# Altium PCB FIT_PM_Dual_Range_AFE.PcbDoc (part 11 of 17)
Units mm, origin at the board's own origin, x right, y up, seen from the top; angles counter-clockwise.
Board outline 259 x 114 mm, 8 copper layers (Top Layer, Mid-Layer 1, Mid-Layer 2, Layer 1, Layer 2, Mid-Layer 3, Mid-Layer 4, Bottom Layer), stack 1.616 mm thick; 963 components, 806 nets, 4757 pads, 2208 vias.
Unrouted connection lines stored in the file: 682.
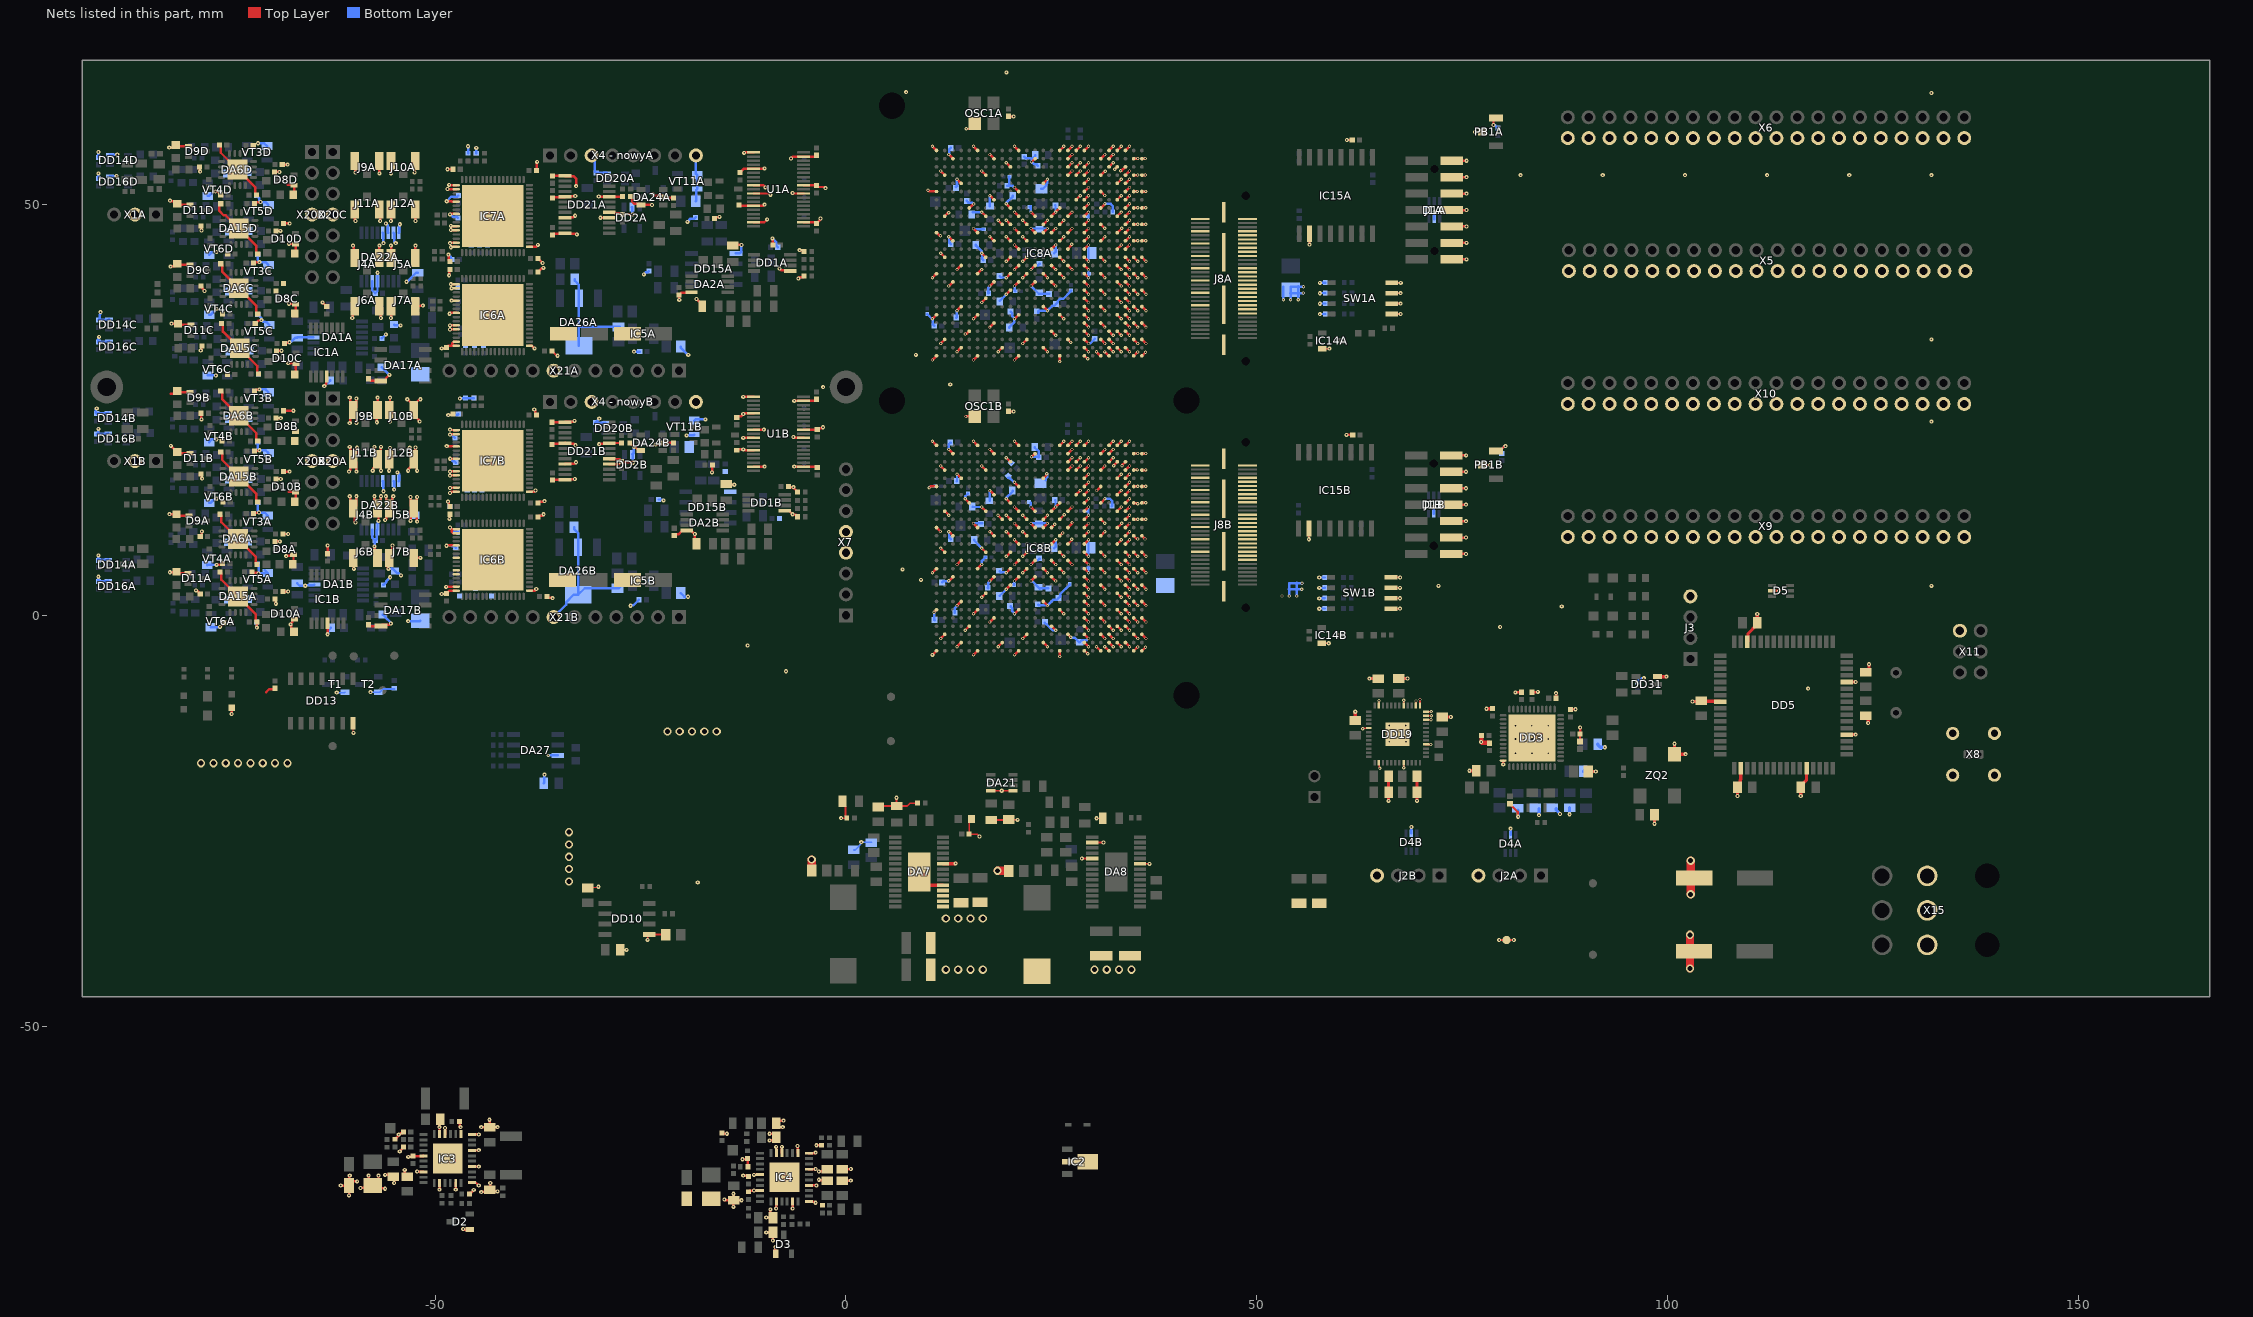
[diagram p13: the nets of this part, all layers, seen from the top]

## Via types
v1: diameter 0.5, hole 0.2, Top Layer to Bottom Layer, tented both sides, 1234 vias
v2: diameter 0.4, hole 0.2, Top Layer to Bottom Layer, tented both sides, 876 vias
v3: diameter 1, hole 0.6, Top Layer to Bottom Layer, tented both sides, 74 vias
v4: diameter 0.8, hole 0.4, Top Layer to Bottom Layer, tented both sides, 15 vias
v5: diameter 0.5, hole 0.2, Top Layer to Bottom Layer, 9 vias

## Nets (pads, with @x,y where several pads share a name; then routed paths per layer and width w, separated by ;. In a path a pad name is that pad's centre, name@x,y a point inside that pad or via, vN(x,y) a via of type N, cw(c..) or ccw(c..) an arc to the next point about the centre after c; other vN are vias at no path point) (continued)
GND: (continued)
  Top Layer w0.3: v1(-82.368,56.936) -82.361,56.943 -81.893,56.943 C154D.1@-81.568,57.268 -81.418,57.118 D9D.1@-80.168,57.118 ; v1(-82.35,12.325) -81.525,12.325 C154A.1@-81.5,12.3 -81.35,12.15 D9A.1@-80.1,12.15 ; v1(-82.3,5.25) -81.55,5.25 C156A.1@-81.5,5.3 ; v1(-82.288,50.478) -82.234,50.478 -82.181,50.425 -81.725,50.425 -81.25,49.95 D11D.1@-80,49.95 ; -82.2,26.968 -82.193,26.975 -81.725,26.975 C154B.1@-81.4,27.3 -81.25,27.15 D9B.1@-80,27.15 ; v1(-82.2,42.45) -82.175,42.475 -81.725,42.475 C154C.1@-81.4,42.8 -81.25,42.65 D9C.1@-80,42.65 ; v1(-82.168,20.633) -82.158,20.633 -81.275,19.75 D11B.1@-80,19.75 ; v1(-82.1,35.5) -81.272,35.5 -81.122,35.35 D11C.1@-79.9,35.35 ; C156A.1@-81.35,5.15 D11A.1@-80.1,5.15 ; v1(-79.124,3.04) -79.085,3.002 -78.997,3.002 -78.76,2.764 -78.76,2.76 C92A.1@-78.6,2.6 ; C89D.1@-78.668,54.568 -78.643,54.543 -78.643,54.033 v1(-78.618,54.008) ; C89A.1@-78.6,9.6 -78.44,9.76 -78.44,10.106 -78.4,10.146 v1(-78.4,10.2) ; v1(-78.537,32.24) -78.499,32.278 -78.499,32.701 C92C.1@-78.4,32.8 ; C286B.1@-78.5,17.2 -78.41,17.11 -78.41,16.678 v1(-78.371,16.64) ; C89B.1@-78.5,24.6 -78.475,24.575 -78.475,23.879 v1(-78.451,23.854) ; C288C.1@-78.5,40.1 -78.34,39.94 -78.34,39.795 -78.086,39.542 v1(-78.086,39.488) ; C286D.1@-78.5,47.4 -78.475,47.375 -78.475,46.865 v1(-78.45,46.84) ; v1(-76.77,51.582) -76.732,51.543 -76.443,51.543 C102D.1@-76.1,51.2 ; v1(-76.602,6.15) -76.589,6.163 -76.037,6.163 C102A.1@-75.9,6.3 ; C91D.1@-76.268,57.268 -76.108,57.108 -76.108,56.308 DA6D.17@-74.068,54.268 -71.928,52.128 -71.928,51.328 C291D.1@-71.768,51.168 ; v1(-76.2,-1.4) C63A.1@-75.7,-0.9 ; C93A.1@-76.2,5.3 -76.04,5.14 -76.04,4.34 DA15A.17@-74,2.3 -71.86,0.16 -71.86,-0.64 C287A.1@-71.7,-0.8 v1(-71.7,-1.5) ; C91A.1@-76.2,12.3 -76.04,12.14 -76.04,11.34 DA6A.17@-74,9.3 -71.86,7.16 -71.86,6.36 C291A.1@-71.7,6.2 ; C287B.1@-76.1,19.9 -75.94,19.74 -75.94,18.94 DA15B.17@-73.9,16.9 -71.76,14.76 -71.76,13.96 C93B.1@-71.6,13.8 ; C91B.1@-76.1,27.3 -75.94,27.14 -75.94,26.34 DA6B.17@-73.9,24.3 -71.76,22.16 -71.76,21.36 C291B.1@-71.6,21.2 ; C91C.1@-76.1,42.8 -75.94,42.64 -75.94,41.84 DA6C.17@-73.9,39.8 -71.76,37.66 -71.76,36.86 C291C.1@-71.6,36.7 ; C93D.1@-76.1,50.1 -76.26,49.94 -76.26,49.662 -76.275,49.647 -76.275,49.233 -75.733,48.692 -75.492,48.692 -71.76,44.96 -71.76,44.16 C287D.1@-71.6,44 ; C93C.1@-76,35.5 -75.84,35.34 -75.84,34.54 DA15C.17@-73.8,32.5 -71.66,30.36 -71.66,29.56 C287C.1@-71.5,29.4 ; v1(-74.781,-12.012) LD1.1@-74.781,-11.239 ; C64A.1@-72.3,5.3 -72.201,5.201 -71.655,5.201 -71.554,5.1 v1(-71.5,5.1) ; C74A.1@-72.1,12.4 -72.013,12.487 -71.488,12.487 v1(-71.45,12.525) ; C64C.1@-72.1,42.9 -72.038,42.962 -71.438,42.962 v1(-71.4,43) ; C64B.1@-72,20 -71.938,20.062 -71.438,20.062 v1(-71.4,20.1) ; C74B.1@-72,27.3 -71.84,27.46 -71.494,27.46 -71.454,27.5 v1(-71.4,27.5) ; C64D.1@-72,50.1 -71.84,50.26 -71.362,50.26 -71.314,50.308 v1(-71.26,50.308) ; C74C.1@-71.9,35.5 -71.509,35.891 -71.19,35.891 v1(-71.152,35.929) ; -70.563,-9.34 -70.22,-8.997 C11.1@-69.481,-8.997 ; C288D.1@-69.568,53.968 v1(-68.968,53.968) ; C286A.1@-69.5,2 -69.437,1.937 -69.437,1.444 v1(-69.398,1.406) ; C288A.1@-69.5,9 v1(-68.9,9) ; C92B.1@-69.4,16.6 v1(-68.8,16.6) ; C288B.1@-69.4,24 v1(-68.8,24) ; C92D.1@-69.4,46.8 v1(-68.84,46.8) ; C286C.1@-69.3,32.2 v1(-68.7,32.2) ; C126D.1@-68.618,54.868 v1(-67.968,54.868) ; C129A.1@-68.55,2.9 v1(-67.9,2.9) ; C126A.1@-68.55,9.9 v1(-67.9,9.9) ; C129B.1@-68.45,17.5 v1(-67.719,17.5) ; C126B.1@-68.45,24.9 v1(-67.265,24.9) ; C129D.1@-68.45,47.7 v1(-67.719,47.7) ; C129C.1@-68.35,33.1 -68.252,33.198 -67.772,33.198 v1(-67.734,33.236) ; v1(-68.15,7.2) -68.096,7.2 -68.046,7.25 -67.375,7.25 D8A.1@-67.25,7.375 -67.25,6.325 C153A.1@-67.35,6.225 ; -67.968,52.396 -67.218,52.396 D8D.1@-67.168,52.346 -67.168,51.296 C153D.1@-67.268,51.196 ; v1(-67.9,30.7) -67,30.7 D10C.1@-66.95,30.65 -66.95,29.45 C155C.1@-67.1,29.3 ; -67.8,15.029 -67.05,15.029 D10B.1@-67,14.979 -67,13.929 C155B.1@-67.1,13.829 ; v1(-67.8,37.929) -67.05,37.929 D8C.1@-67,37.879 -67,36.829 C153C.1@-67.1,36.729 ; v1(-67.8,45.229) -67.05,45.229 D10D.1@-67,45.179 -67,44.129 C155D.1@-67.1,44.029 ; C155A.1@-67.2,-2 -67.525,-1.675 -67.525,-1.175 v1(-67.6,-1.1) -67.6,-1.046 -67.425,-0.871 -67.425,-0.575 -67.3,-0.45 D10A.1@-67.15,-0.45 ; v1(-63.7,38.1) C54A.1@-63.2,37.6 ; v1(-63.5,27.9) -63.5,27.951 -63.275,28.176 -63.275,28.975 IC1A.11@-63.2,29.05 ; IC1B.11@-63.104,-0.963 -63.104,-2.296 v1(-63.1,-2.3) ; C54B.1@-63.1,7.5 v1(-63.1,8.5) ; v1(-61.5,-69.4) -61.486,-69.414 C14.2@-60.481,-69.414 ; v1(-60.5,-70.6) -60.488,-70.588 -60.488,-69.422 C14.2@-60.481,-69.414 ; v1(-60.5,17.5) -60.35,17.65 -60.35,18.625 J11B.2@-59.975,19 ; C14.2@-60.481,-69.375 -60.006,-68.9 v1(-59.5,-68.9) ; v1(-60.4,-68.2) -60.44,-68.24 -60.44,-69.373 C14.2@-60.481,-69.414 ; v1(-60.4,14.5) -60.35,14.45 -60.35,13.375 J4B.2@-59.975,13 ; v1(-60.4,20.5) -60.35,20.45 -60.35,19.375 J11B.2@-59.975,19 ; v1(-60.4,23.4) -60.35,23.45 -60.35,24.625 J9B.2@-59.975,25 ; v1(-60.4,26.5) -60.35,26.45 -60.35,25.375 J9B.2@-59.975,25 ; v1(-60.1,36.2) -60.053,36.247 -60.053,37.343 J6A.2@-59.775,37.621 ; v1(-60,45) -59.888,44.888 -59.888,43.627 J4A.2@-59.775,43.514 ; J6B.2@-59.975,7 -59.9,6.925 v1(-59.9,5.65) ; J11A.2@-59.775,49.407 -59.775,48.075 v1(-59.7,48) ; J9A.2@-59.775,55.3 -59.726,55.251 -59.726,53.926 v1(-59.7,53.9) ; v1(-59.7,11.3) -59.8,11.4 -59.8,12.825 J4B.2@-59.975,13 ; v1(-59.6,14.5) -59.6,13.375 J4B.2@-59.975,13 ; v1(-59.6,17.5) -59.6,18.625 J11B.2@-59.975,19 ; v1(-59.6,23.4) -59.6,24.625 J9B.2@-59.975,25 ; v1(-59.6,26.4) -59.6,25.375 J9B.2@-59.975,25 ; v1(-59.5,20.4) -59.6,20.3 -59.6,19.375 J11B.2@-59.975,19 ; v1(-59.1,-69.7) -57.867,-69.7 C13.2@-57.581,-69.414 ; v1(-58.1,-68.2) -58.1,-68.895 C13.2@-57.581,-69.414 ; C131B.1@-58.1,-1.15 -57.945,-1.305 DA17B.4@-56.6,-1.305 -56.45,-1.155 -55.609,-1.155 -55.454,-1 v1(-55.4,-1) ; C131A.1@-58.1,28.8 -57.831,28.531 DA17A.4@-56.615,28.531 -56.14,28.531 -55.99,28.681 -55.99,28.858 v1(-55.572,29.276) ; v1(-57.6,17.6) -57.551,17.649 -57.551,17.899 -57.025,18.425 J11B.2@-57.025,19 ; v1(-57.4,8.4) -57.343,8.343 -57.343,7.318 J6B.2@-57.025,7 ; v1(-57.4,14.5) -57.4,13.375 J4B.2@-57.025,13 ; v1(-57.4,20.5) -57.4,19.375 J11B.2@-57.025,19 ; v1(-57.1,23.5) -57.1,24.925 J9B.2@-57.025,25 -57,25.025 v1(-57,26.5) ; v1(-56.9,-68.2) -56.9,-68.733 C13.2@-57.581,-69.414 ; v1(-56.9,11.5) -56.9,12.875 J4B.2@-57.025,13 ; J6A.2@-56.825,37.621 -56.619,37.415 v1(-56.619,36.185) ; J4A.2@-56.825,43.514 -56.825,44.975 v1(-56.8,45) ; J11A.2@-56.825,49.407 -56.7,49.282 v1(-56.7,48) ; J9A.2@-56.825,55.3 -56.825,53.825 v1(-56.8,53.8) ; v1(-56.6,14.5) -56.65,14.45 -56.65,13.375 J4B.2@-57.025,13 ; v1(-56.6,17.6) -56.65,17.65 -56.65,18.625 J11B.2@-57.025,19 ; v1(-56.6,20.5) -56.6,20.4 -56.65,20.35 -56.65,19.375 J11B.2@-57.025,19 ; v1(-56.1,-69.8) -56.182,-69.718 -57.277,-69.718 C13.2@-57.581,-69.414 ; v1(-56.1,-68.1) -55.295,-68.1 C19.1@-55.081,-68.314 -55,-68.395 v1(-55,-69.1) ; v1(-56.1,11.6) -55.95,11.75 -55.95,12.625 J5B.2@-55.575,13 ; v1(-56,14.5) -55.95,14.45 -55.95,13.375 J5B.2@-55.575,13 ; v1(-55.7,5.65) -55.7,5.7 -55.8,5.8 -55.8,6.775 J7B.2@-55.575,7 -55.575,7.575 -55.783,7.783 -55.367,7.783 -55.2,7.95 v1(-55.2,8.5) ; v1(-55.6,17.6) -55.6,18.975 -55.505,19.07 v1(-55.505,20.373) ; v1(-55.5,23.6) -55.5,24.925 J10B.2@-55.575,25 -55.5,25.075 v1(-55.5,26.5) ; v1(-55.4,36.2) -55.375,36.225 J7A.2@-55.375,37.621 ; v1(-55.4,45) -55.375,44.975 J5A.2@-55.375,43.514 ; v1(-55.4,48) -55.375,48.025 J12A.2@-55.375,49.407 ; v1(-55.4,53.8) -55.375,53.825 J10A.2@-55.375,55.3 ; v1(-55.1,14.5) -55.2,14.4 -55.2,13.375 J5B.2@-55.575,13 ; R48.1@-54.881,-63.774 -54.861,-63.774 -54.721,-63.634 -54.721,-63.614 -54.437,-63.331 v1(-54.437,-63.206) -54.383,-63.206 -54.191,-63.014 -54.021,-63.014 R58.1@-53.881,-62.874 ; v1(-54.312,-65.243) -54.312,-65.238 -54.041,-64.967 -54.041,-64.874 C44.1@-53.881,-64.714 ; v1(-53.7,-67.5) -53.7,-67.995 C29.1@-53.381,-68.314 ; v1(-53.4,26.3) -53.35,26.3 J10B.2@-52.625,25.575 ; v1(-53.3,17.6) -53.3,17.75 -52.625,18.425 J12B.2@-52.625,19 ; v1(-53.282,-65.92) -53.244,-65.881 -52.748,-65.881 C20.1@-52.681,-65.814 -51.465,-65.814 IC3.27@-51.44,-65.789 ; v1(-53.1,20.4) -53,20.3 -53,19.375 J12B.2@-52.625,19 ; v1(-53,11.5) -53,12.625 J5B.2@-52.625,13 ; v1(-53,14.4) -53,13.375 J5B.2@-52.625,13 ; J7B.2@-52.625,7 v1(-51.8,7) ; v1(-52.5,53.9) -52.474,53.926 -52.474,55.251 J10A.2@-52.425,55.3 ; J7A.2@-52.425,37.621 -52.346,37.7 v1(-51.5,37.7) ; J5A.2@-52.425,43.514 -52.425,44.975 v1(-52.4,45) ; J12A.2@-52.425,49.407 -52.425,48.025 v1(-52.4,48) ; v1(-52.402,20.432) -52.402,19.223 J12B.2@-52.625,19 ; v1(-52.2,-67.7) -52.161,-67.739 IC3.30@-51.44,-67.739 ; v1(-52.2,11.4) -52.2,11.5 -52.25,11.55 -52.25,12.625 J5B.2@-52.625,13 ; v1(-52.2,14.4) -52.25,14.35 -52.25,13.375 J5B.2@-52.625,13 ; v1(-52.2,17.6) -52.25,17.65 -52.25,18.625 J12B.2@-52.625,19 ; v1(-51.9,23.6) -52,23.7 -52,23.8 -52.625,24.425 J10B.2@-52.625,25 J10B.2@-52.625,25.575 ; v1(-51.8,26.3) -51.9,26.3 J10B.2@-52.625,25.575 ; v1(-49.5,-69.9) -49.5,-69.8 -49.468,-69.768 -49.468,-69.084 IC3.2@-49.461,-69.077 ; IC3.21@-49.461,-63.152 -49.475,-63.138 -49.475,-62.325 v1(-49.5,-62.3) -49.488,-62.288 -49.488,-61.422 C23.1@-49.381,-61.314 ; v1(-49.2,2.6) -48.65,2.6 C16B.1@-48.6,2.65 -48.244,3.006 IC6B.32@-47.427,3.006 ; v1(-49.2,32.5) -48.7,32.5 C16A.1@-48.6,32.6 -48.394,32.806 -47.911,32.806 ; IC3.20@-48.803,-63.152 -48.803,-62.403 v1(-48.8,-62.4) ; v1(-48.665,3.468) -48.626,3.506 IC6B.31@-47.427,3.506 ; v1(-48.626,8.47) -48.59,8.506 IC6B.21@-47.427,8.506 ; v1(-48.6,50.4) -48.586,50.414 -47.984,50.414 -47.926,50.356 IC7A.21@-47.427,50.356 ; v1(-48.589,20.597) -48.55,20.559 -48.459,20.559 -48.456,20.556 IC7B.21@-47.427,20.556 ; v1(-48.5,51.9) -48.456,51.856 IC7A.18@-47.427,51.856 ; v1(-48.5,54.3) v1(-48.5,54.3) C8A.1@-47.853,54.301 ; v1(-48.445,13.842) -48.445,13.788 -48.376,13.72 -48.376,13.425 C9B.1@-48.216,13.265 ; v1(-48.413,24.368) -48.375,24.407 -47.947,24.407 C8B.1@-47.853,24.501 ; v1(-48.4,43.9) -48.376,43.876 -48.376,43.225 C9A.1@-48.216,43.065 ; v1(-48.3,41.4) -48.3,42.025 C10A.1@-48.216,42.109 ; v1(-48.3,52.4) -48.256,52.356 IC7A.17@-47.427,52.356 ; v1(-48.281,11.742) -48.249,11.774 -48.249,12.277 C10B.1@-48.216,12.309 ; v1(-48.251,36.713) -48.197,36.713 -48.104,36.806 IC6A.24@-47.427,36.806 ; v1(-48.2,10.7) -48.006,10.506 ; v1(-48.2,14.9) -48.044,15.056 IC7B.32@-47.427,15.056 ; v1(-48.2,15.5) -48.144,15.556 IC7B.31@-47.427,15.556 ; v1(-48.2,17) -48.144,17.056 IC7B.28@-47.427,17.056 ; v1(-48.2,17.5) -48.144,17.556 IC7B.27@-47.427,17.556 ; v1(-48.2,22) -48.162,22.038 -47.745,22.038 -47.727,22.056 IC7B.18@-47.427,22.056 ; v1(-48.2,22.6) -48.162,22.562 -47.733,22.562 -47.727,22.556 IC7B.17@-47.427,22.556 ; v1(-48.2,34.8) -48.194,34.806 IC6A.28@-47.427,34.806 ; v1(-48.2,35.3) -48.1,35.3 -48.094,35.306 IC6A.27@-47.427,35.306 ; v1(-48.2,45.3) -48.144,45.356 IC7A.31@-47.427,45.356 ; v1(-48.19,48.8) -48.135,48.856 IC7A.24@-47.427,48.856 ; v1(-48.175,19.056) IC7B.24@-47.427,19.056 ; v1(-48.1,40.3) -48.094,40.306 IC6A.17@-47.427,40.306 ; v1(-48.1,44.8) -48.044,44.856 IC7A.32@-47.427,44.856 ; v1(-48.1,46.9) -48.056,46.856 IC7A.28@-47.427,46.856 ; v1(-48.1,47.4) -48.056,47.356 IC7A.27@-47.427,47.356 ; v1(-47.993,38.299) -47.987,38.306 IC6A.21@-47.427,38.306 ; v1(-47.993,39.8) -47.987,39.806 IC6A.18@-47.427,39.806 ; v1(-47.5,-69.9) -47.495,-69.895 IC3.5@-47.495,-69.077 ; IC6B.18@-47.427,10.006 -47.83,10.006 -48.006,10.182 -48.006,10.506 ; IC6B.17@-47.427,10.506 -48.006,10.506 ; IC6A.32@-47.427,32.806 -47.911,32.806 ; IC6A.31@-47.427,33.306 -47.735,33.306 -47.911,33.13 -47.911,32.806 ; R45.1@-47.041,-61.614 -47.002,-61.653 -47.002,-62.198 v1(-46.9,-62.3) ; v1(-46.6,-74.7) -46.536,-74.764 D2.1@-45.781,-74.764 ; R43.1@-45.841,-70.414 -45.841,-70.394 -45.701,-70.254 -45.583,-70.254 -45.307,-69.978 v1(-45.307,-69.936) ; IC3.7@-45.515,-69.039 -45.49,-69.064 -45.036,-69.064 v1(-44.7,-69.4) ; IC3.10@-45.515,-67.089 -44.711,-67.089 v1(-44.7,-67.1) ; IC3.13@-45.515,-65.139 -44.739,-65.139 v1(-44.7,-65.1) ; IC3.16@-45.515,-63.189 -44.711,-63.189 v1(-44.7,-63.2) ; v1(-44.4,-70.2) -44.355,-70.155 -43.622,-70.155 C22.1@-43.381,-69.914 ; v1(-44.4,-62.3) -44.386,-62.314 C21.1@-43.381,-62.314 ; v1(-43.4,-61.4) -43.381,-61.419 C21.1@-43.381,-62.314 ; v1(-43.3,-69.1) -43.315,-69.115 -43.315,-69.848 C22.1@-43.381,-69.914 ; v1(-42.425,-70.108) -43.187,-70.108 C22.1@-43.381,-69.914 ; v1(-42.4,-62.3) -42.407,-62.307 -43.373,-62.307 C21.1@-43.381,-62.314 ; IC6B.49@-38.527,3.006 -37.894,3.006 v1(-37.7,3.2) ; IC7B.49@-38.527,15.056 -37.944,15.056 v1(-37.8,15.2) ; IC6A.49@-38.527,32.806 -38.227,32.806 -37.922,32.5 v1(-37.9,32.5) ; IC7A.49@-38.527,44.856 -37.744,44.856 v1(-37.5,45.1) ; v1(-37.944,25.051) -37.944,24.997 -37.833,24.886 -37.833,24.522 C60B.1@-37.673,24.362 ; C60A.1@-37.673,54.162 -37.637,54.199 -37.637,55.163 v1(-37.6,55.2) ; C61B.1@-37.491,13.659 -37.331,13.819 -36.781,13.819 v1(-36.7,13.9) ; C61A.1@-37.491,43.459 -36.916,42.883 v1(-36.916,42.879) ; C18B.1@-37.479,11.98 -37.319,12.14 -36.96,12.14 v1(-36.8,12.3) ; C18A.1@-37.479,41.78 -37.001,42.258 -36.878,42.258 v1(-36.84,42.296) ; C17B.1@-36.4,2.3 -36.24,2.14 -35.794,2.14 -35.754,2.1 v1(-35.7,2.1) ; C37B.1@-35.8,20.8 -35.698,20.903 -34.25,20.903 -34.15,21.003 -34.05,20.903 -33.168,20.903 -32.969,20.703 v1(-32.914,20.703) ; C17A.1@-35.8,32.2 -35.2,31.6 v1(-35.1,31.6) ; C37A.1@-35.8,50.7 C37A.1@-35.7,50.8 -35.598,50.902 -34.25,50.902 -34.15,51.002 -33.055,51.002 -33.006,51.052 v1(-32.952,51.052) ; C36B.1@-35.796,23.496 DD21B.13@-34.204,23.496 ; C116B.1@-35.7,16.45 -35.671,16.479 -34.229,16.479 DD21B.24@-34.2,16.508 -34.15,16.558 -33.042,16.558 v1(-33,16.6) ; C116A.1@-35.7,46.3 -35.543,46.457 -34.25,46.457 DD21A.24@-34.2,46.507 -34.15,46.457 -32.886,46.457 -32.808,46.379 v1(-32.754,46.379) ; C15A.1@-35.7,53.5 -35.696,53.496 -34.204,53.496 DD21A.13@-34.2,53.492 -34.15,53.442 -33.142,53.442 -33.001,53.301 -32.823,53.123 -32.823,52.263 v1(-32.843,52.243) ; DD21B.21@-34.2,18.413 -34.15,18.463 -33.083,18.463 -32.916,18.629 v1(-32.862,18.629) ; DD21B.13@-34.2,23.493 DD21B.13@-34.204,23.496 ; DD21A.21@-34.2,48.412 -34.15,48.462 -33.202,48.462 -33.025,48.639 v1(-32.971,48.639) ; v1(-33.038,23.678) -33.092,23.678 -33.227,23.543 -34.157,23.543 DD21B.13@-34.204,23.496 ; v1(-30.096,50.983) -30.081,50.968 -28.815,50.968 DD21A.8@-28.8,50.952 -28.776,50.976 -27.224,50.976 C39A.1@-27.2,51 ; v1(-30.052,20.825) -29.998,20.825 -29.92,20.903 -28.85,20.903 -28.776,20.976 -27.324,20.976 C38B.1@-27.3,21 ; v1(-29.9,48.4) -28.813,48.4 DD21A.4@-28.8,48.412 ; DD21B.4@-28.8,18.413 -28.797,18.41 -27.64,18.41 C15B.1@-27.3,18.75 ; DD21B.5@-28.8,19.048 -28.75,18.998 -27.548,18.998 C15B.1@-27.3,18.75 ; DD21A.5@-28.8,49.047 -28.225,49.047 -28.138,48.96 -27.36,48.96 C38A.1@-27.2,48.8 v1(-26,48.8) ; C39B.1@-26.3,21 -25.818,20.518 v1(-25.818,20.509) ; C36A.1@-26.2,51 -26.04,50.84 -26.04,50.34 -25.8,50.1 -25.1,50.1 DA24A.6@-24.95,49.95 -24.947,49.953 -23.612,49.953 v1(-23.61,49.955) ; v1(-25.925,18.577) -25.964,18.615 -27.165,18.615 C15B.1@-27.3,18.75 ; v1@-25.84,20.509 -25.801,20.47 -25.645,20.47 -25.225,20.05 DA24B.6@-25,20.05 ; v1(-23.477,51.286) -23.477,51.232 -23.301,51.056 -23.301,51.05 -22.4,51.05 DA24A.2@-22.25,50.9 -22.2,50.85 -21.05,50.85 C82A.1@-21,50.8 ; v1(-23.186,20.81) -23.132,20.81 -23.093,20.85 -22.45,20.85 DA24B.2@-22.3,21 C82B.1@-21,21 ; C95B.1@-20.9,9.7 -20.74,9.86 -20.39,9.86 -19.925,10.325 DA2B.8@-19.4,10.325 -18.875,10.325 -18.45,9.9 v1(-18.4,9.9) -18.4,8.9 R2B.1@-18.2,8.7 ; v1(-20.3,38.4) C100A.1@-20.3,39 -20.05,39.25 -18.875,39.25 DA2A.8@-18.8,39.325 ; v1(-18.2,38.5) -18.175,38.5 -17.5,37.825 R2A.1@-17.5,37.6 ; v1(-16.3,17.4) -16.3,18.25 C96B.1@-16.25,18.3 ; C96A.1@-16,48.3 -15.84,48.46 -15.44,48.46 v1(-15.4,48.5) ; C77.1@-15.081,-63.014 -15,-63.095 -14.505,-63.095 v1(-14.5,-63.1) ; v1(-14.8,-71.1) -14.686,-71.214 C48.1@-13.681,-71.214 ; R118B.1@-14.6,16 -14.5,15.9 v1(-13.6,15.9) ; R118A.1@-13.8,45 -13.714,45.086 v1(-12.713,45.086) ; v1(-13.7,-72) -13.7,-71.233 C48.1@-13.681,-71.214 ; v1(-13.7,-70.4) -13.685,-70.415 -13.685,-71.21 C48.1@-13.681,-71.214 ; R51B.1@-13.3,20.1 -13.2,20.2 v1(-12.5,20.2) -12.446,20.2 -12.346,20.1 U1B.14@-11.25,20.1 ; C112B.1@-13.3,24.1 -13.14,24.26 -12.74,24.26 v1(-12.5,24.5) -12.446,24.5 -12.346,24.6 U1B.5@-11.25,24.6 ; R51A.1@-13,49.96 -12.886,49.846 -10.099,49.846 -9.954,49.991 v1(-9.9,49.991) ; C97A.1@-12.9,53.9 -12.454,54.346 U1A.5@-11.25,54.346 -9.954,54.346 v1(-9.9,54.4) ; v1(-12.7,-71.2) -12.707,-71.207 -13.673,-71.207 C48.1@-13.681,-71.214 ; v1(-12.6,-66.2) -12.067,-66.2 R98.1@-11.981,-66.114 -11.941,-66.154 R91.1@-11.941,-67.114 ; v1(-12.5,-68.2) -11.995,-68.2 C49.1@-11.881,-68.314 ; v1(-12.5,21.6) U1B.11@-11.25,21.6 ; v1(-12.5,26.6) U1B.1@-11.25,26.6 ; v1(-12.4,56.3) -12.354,56.346 U1A.1@-11.25,56.346 ; R94.1@-11.881,-70.174 -11.745,-70.039 -11.293,-70.039 -11.254,-70 v1(-11.2,-70) -11.173,-70.027 IC4.30@-10.444,-70.027 ; U1B.18@-11.25,18.1 v1(-9.9,18.1) ; U1B.9@-11.25,22.6 v1(-10,22.6) ; U1A.18@-11.25,47.846 -9.954,47.846 v1(-9.6,48.2) ; U1A.11@-11.25,51.346 -9.346,51.346 v1(-9.2,51.2) ; U1A.9@-11.25,52.346 -10.046,52.346 v1(-9.8,52.1) ; v1(-11.2,-68.1) -11.177,-68.077 IC4.27@-10.444,-68.077 ; v1(-9.7,-75.1) -9.686,-75.114 C72.1@-8.881,-75.114 -8.9,-75.133 v1(-8.9,-76.1) ; v1(-9.7,-73.3) -9.686,-73.314 C73.1@-8.881,-73.314 -9.2,-72.995 v1(-9.2,-72.3) ; v1(-9.3,-63.9) -9.28,-63.88 -8.847,-63.88 C75.1@-8.481,-63.514 -8.481,-63.475 -8.856,-63.1 v1(-9.3,-63.1) ; v1(-8.961,45.886) -8.93,45.855 -8.93,45.13 C95A.1@-8.9,45.1 ; v1(-8.6,-76.9) -8.585,-76.915 -8.585,-77.66 D3.1@-8.531,-77.714 ; v1(-8.5,-72.2) -8.464,-72.164 IC4.2@-8.464,-71.365 ; v1(-8.5,-64.7) -8.464,-64.736 IC4.21@-8.464,-65.44 ; C76.1@-8.481,-61.925 -8.106,-62.3 v1(-7.7,-62.3) ; C76.1@-8.481,-61.814 -8.167,-61.5 v1(-7.6,-61.5) ; v1(-8.1,42.2) -7.9,42 -6.875,42 DD1A.5@-6.8,41.925 ; IC4.20@-7.806,-65.44 -7.806,-64.706 v1(-7.8,-64.7) ; DD1B.5@-7.458,12.731 -6.933,12.731 -6.503,12.3 v1(-6.5,12.3) -6.462,12.262 -6.162,12.262 -6.06,12.16 -6.04,12.16 -5.9,12.02 R77B.1@-5.9,12 ; C100B.1@-7,15.7 -6.9,15.6 v1(-6.4,15.6) -6.362,15.562 -6.362,15.482 -5.9,15.02 R75B.1@-5.9,15 ; v1(-6.7,55.6) -6.454,55.846 U1A.37@-5.15,55.846 -3.754,55.846 C111A.1@-3.6,56 ; v1(-6.5,-72.2) -6.498,-72.198 IC4.5@-6.498,-71.365 ; v1(-6.5,51.4) -6.446,51.346 U1A.28@-5.15,51.346 ; v1(-6.4,21.7) -6.3,21.6 U1B.28@-5.15,21.6 ; v1(-6.3,18.1) U1B.21@-5.15,18.1 -3.6,18.1 C97B.1@-3.5,18 ; v1(-6.3,26.1) U1B.37@-5.15,26.1 -3.8,26.1 C111B.1@-3.6,26.3 ; v1(-5.9,-64.6) -5.848,-64.652 IC4.17@-5.848,-65.44 ; v1(-5.8,41) -5.66,41.14 -5.24,41.14 -5.1,41.28 R77A.1@-5.1,41.3 ; v1(-5.64,44.457) -5.602,44.419 -5.219,44.419 R75A.1@-5.1,44.3 ; U1B.30@-5.15,22.6 C110B.1@-3.5,22.6 -3.34,22.76 -2.994,22.76 -2.854,22.9 v1(-2.8,22.9) ; U1A.21@-5.15,47.846 -3.746,47.846 C110A.1@-3.6,47.7 -3.1,48.2 v1(-3.1,48.3) ; U1A.30@-5.15,52.346 -3.646,52.346 C112A.1@-3.6,52.3 -3.44,52.14 -2.64,52.14 v1(-2.5,52) ; IC4.7@-4.519,-71.327 -4.494,-71.352 -3.948,-71.352 -3.8,-71.5 v1(-3.7,-71.5) ; IC4.10@-4.519,-69.377 -3.623,-69.377 v1(-3.6,-69.4) ; IC4.13@-4.519,-67.427 -3.727,-67.427 v1(-3.7,-67.4) ; IC4.16@-4.519,-65.477 -4.518,-65.479 -3.779,-65.479 v1(-3.7,-65.4) ; v1(-3.6,-64.5) -3.586,-64.514 R86.1@-2.981,-64.514 ; v1(-3.3,-68.7) -3.255,-68.745 -2.35,-68.745 C70.1@-2.281,-68.814 ; v1(-3.3,-67.7) -3.255,-67.655 -2.522,-67.655 C68.1@-2.281,-67.414 ; C71.1@-0.481,-68.814 v1(0.586,-68.814) v1@0.6,-68.8 ; C69.1@-0.481,-67.414 0.586,-67.414 v1(0.6,-67.4) ; v2(9.979,51.735) 10.007,51.735 10.137,51.605 11,51.605 IC8A.AA26@11.019,51.586 ; v2(10.116,15.528) 10.143,15.528 10.301,15.686 IC8B.AA26@11.019,15.686 ; v1(10.519,-4.814) IC8B.A26@11.019,-4.314 ; v2(10.519,5.186) IC8B.L26@11.019,5.686 ; v2(10.519,21.186) IC8B.AF26@11.019,20.686 ; v2(10.519,31.086) IC8A.A26@11.019,31.586 ; v2(10.519,36.086) IC8A.F26@11.019,36.586 ; v2(10.519,41.086) IC8A.L26@11.019,41.586 ; v2(10.519,57.086) IC8A.AF26@11.019,56.586 ; v2(10.719,0.385) IC8B.F26@11.019,0.686 ; IC8B.T26@11.019,10.686 11.019,10.681 11.493,10.207 v2(11.493,10.202) ; IC8A.T26@11.019,46.586 11.386,46.219 11.481,46.219 v2(11.5,46.2) ; v2(11.519,-2.814) IC8B.C25@12.019,-2.314 ; v2(11.519,8.186) IC8B.N25@12.019,7.686 ; v2(11.519,18.186) IC8B.AC25@12.019,17.686 ; v2(11.519,33.086) IC8A.C25@12.019,33.586 ; v2(11.519,44.086) IC8A.N25@12.019,43.586 ; v2(11.519,54.086) IC8A.AC25@12.019,53.586 ; IC8B.V25@12.019,12.686 12.022,12.686 12.516,12.192 v2(12.519,12.192) ; IC8A.V25@12.019,48.586 12.414,48.981 12.481,48.981 v2(12.5,49) ; v2(12.519,4.194) 12.523,4.194 13.015,4.686 IC8B.K24@13.019,4.686 ; v2(12.519,10.186) IC8B.R24@13.019,9.686 ; v2(12.519,20.186) IC8B.AE24@13.019,19.686 ; v2(12.519,40.086) IC8A.K24@13.019,40.586 ; v2(12.519,46.086) IC8A.R24@13.019,45.586 ; v2(12.519,56.086) IC8A.AE24@13.019,55.586 ; v2(13.519,-3.814) IC8B.B23@14.019,-3.314 ; v2(13.519,1.186) IC8B.G23@14.019,1.686 ; v2(13.519,6.186) IC8B.M23@14.019,6.686 ; v2(13.519,17.186) IC8B.AB23@14.019,16.686 ; v2(13.519,32.086) IC8A.B23@14.019,32.586 ; v2(13.519,37.086) IC8A.G23@14.019,37.586 ; v2(13.519,42.086) IC8A.M23@14.019,42.586 ; v2(13.519,53.086) IC8A.AB23@14.019,52.586 ; v2(14.519,-1.814) IC8B.D22@15.019,-1.314 ; v2(14.519,14.186) IC8B.W22@15.019,13.686 ; v2(14.519,34.239) 14.538,34.258 14.651,34.258 14.979,34.586 IC8A.D22@15.019,34.586 ; v2@14.6,24.21 OSC1B.2@15.665,24.21 ; IC8A.W22@15.019,49.586 15.033,49.586 15.524,50.077 v2(15.538,50.077) ; v2(15.519,-4.814) IC8B.A21@16.019,-4.314 ; v2(15.519,0.186) IC8B.F21@16.019,0.686 ; v2(15.519,11.186) IC8B.T21@16.019,10.686 ; v2(15.519,21.186) IC8B.AF21@16.019,20.686 ; v2(15.519,31.086) IC8A.A21@16.019,31.586 ; v2(15.519,36.086) IC8A.F21@16.019,36.586 ; v2(15.519,47.086) IC8A.T21@16.019,46.586 ; v2(15.519,57.086) IC8A.AF21@16.019,56.586 ; IC8B.L21@16.019,5.686 v2(16.519,6.186) ; IC8A.L21@16.019,41.586 v2(16.519,42.086) ; v2(16.519,2.186) IC8B.H20@17.019,2.686 ; v2(16.519,8.186) IC8B.N20@17.019,7.686 ; v2(16.519,13.186) IC8B.V20@17.019,12.686 ; v2(16.519,18.186) IC8B.AC20@17.019,17.686 ; v2(16.519,38.086) IC8A.H20@17.019,38.586 ; v2(16.519,44.086) IC8A.N20@17.019,43.586 ; v2(16.519,49.086) IC8A.V20@17.019,48.586 ; v2(16.519,54.086) IC8A.AC20@17.019,53.586 ; v2(17.519,-0.814) IC8B.E19@18.019,-0.314 ; v2(17.519,4.186) IC8B.K19@18.019,4.686 ; v2(17.519,10.186) IC8B.R19@18.019,9.686 ; v2(17.519,15.186) IC8B.Y19@18.019,14.686 ; v2(17.519,20.186) IC8B.AE19@18.019,19.686 ; v2(17.519,35.086) IC8A.E19@18.019,35.586 ; v2(17.519,40.086) IC8A.K19@18.019,40.586 ; v2(17.519,46.086) IC8A.R19@18.019,45.586 ; v2(17.519,51.086) IC8A.Y19@18.019,50.586 ; v2(17.519,56.086) IC8A.AE19@18.019,55.586 ; v2(18.512,12.186) 18.515,12.186 19.015,11.686 IC8B.U18@19.019,11.686 ; v2(18.519,-3.814) IC8B.B18@19.019,-3.314 ; v2(18.519,32.086) IC8A.B18@19.019,32.586 ; v2(18.519,48.086) IC8A.U18@19.019,47.586 ; v2(19.519,3.186) IC8B.J17@20.019,3.686 ; v2(19.519,5.186) IC8B.L17@20.019,5.686 ; v2(19.519,7.186) IC8B.N17@20.019,7.686 ; v2(19.519,10.186) IC8B.R17@20.019,9.686 ; v2(19.519,12.186) IC8B.U17@20.019,11.686 ; v2(19.519,14.186) IC8B.W17@20.019,13.686 ; v2(19.519,19.186) IC8B.AD17@20.019,18.686 ; v2(19.519,39.086) IC8A.J17@20.019,39.586 ; v2(19.519,41.086) IC8A.L17@20.019,41.586 ; v2(19.519,43.086) IC8A.N17@20.019,43.586 ; v2(19.519,46.086) IC8A.R17@20.019,45.586 ; v2(19.519,48.086) IC8A.U17@20.019,47.586 ; v2(19.519,50.086) IC8A.W17@20.019,49.586 ; v2(19.519,55.086) IC8A.AD17@20.019,54.586 ; v2(20.519,-4.814) IC8B.A16@21.019,-4.314 ; v2(20.519,0.186) IC8B.F16@21.019,0.686 ; v2(20.519,4.186) IC8B.K16@21.019,4.686 ; v2(20.519,6.186) IC8B.M16@21.019,6.686 ; v2(20.519,9.186) IC8B.P16@21.019,8.686 ; v2(20.519,11.186) IC8B.T16@21.019,10.686 ; v2(20.519,13.186) IC8B.V16@21.019,12.686 ; v2(20.519,16.186) IC8B.AA16@21.019,15.686 ; v2(20.519,21.186) IC8B.AF16@21.019,20.686 ; v2(20.519,31.086) IC8A.A16@21.019,31.586 ; v2(20.519,36.086) IC8A.F16@21.019,36.586 ; v2(20.519,40.086) IC8A.K16@21.019,40.586 ; v2(20.519,42.086) IC8A.M16@21.019,42.586 ; v2(20.519,45.086) IC8A.P16@21.019,44.586 ; v2(20.519,47.086) IC8A.T16@21.019,46.586 ; v2(20.519,49.086) IC8A.V16@21.019,48.586 ; v2(20.519,52.086) IC8A.AA16@21.019,51.586 ; v2(20.519,57.086) IC8A.AF16@21.019,56.586 ; v2(21.519,-2.814) IC8B.C15@22.019,-2.314 ; v2(21.519,5.186) IC8B.L15@22.019,5.686 ; v2(21.519,7.186) IC8B.N15@22.019,7.686 ; v2(21.519,10.186) IC8B.R15@22.019,9.686 ; v2(21.519,12.186) IC8B.U15@22.019,11.686 ; v2(21.519,33.086) IC8A.C15@22.019,33.586 ; v2(21.519,41.086) IC8A.L15@22.019,41.586 ; v2(21.519,43.086) IC8A.N15@22.019,43.586 ; v2(21.519,46.086) IC8A.R15@22.019,45.586 ; v2(21.519,48.086) IC8A.U15@22.019,47.586 ; v2(22.519,4.186) IC8B.K14@23.019,4.686 ; v2(22.519,6.186) IC8B.M14@23.019,6.686 ; v2(22.519,11.186) IC8B.T14@23.019,10.686 ; v2(22.519,13.186) IC8B.V14@23.019,12.686 ; v2(22.519,40.086) IC8A.K14@23.019,40.586 ; v2(22.519,42.086) IC8A.M14@23.019,42.586 ; v2(22.519,47.086) IC8A.T14@23.019,46.586 ; v2(22.519,49.086) IC8A.V14@23.019,48.586 ; v2(22.589,19.292) 22.607,19.292 23.001,19.686 IC8B.AE14@23.019,19.686 ; v2(22.589,55.192) 22.607,55.192 23.001,55.586 IC8A.AE14@23.019,55.586 ; IC8B.B13@24.019,-3.314 v2(24.519,-3.814) ; IC8B.G13@24.019,1.686 v2(24.519,1.186) ; IC8B.L13@24.019,5.686 v2(24.519,5.186) ; IC8B.T13@24.019,10.686 v2(24.519,11.186) ; IC8B.U13@24.019,11.686 v2(24.519,12.186) ; IC8B.AB13@24.019,16.686 24.434,17.101 24.434,17.232 v2(24.453,17.252) ; IC8A.B13@24.019,32.586 v2(24.519,32.086) ; IC8A.G13@24.019,37.586 v2(24.519,37.086) ; IC8A.L13@24.019,41.586 v2(24.519,41.086) ; IC8A.T13@24.019,46.586 v2(24.519,47.086) ; IC8A.U13@24.019,47.586 v2(24.519,48.086) ; IC8A.AB13@24.019,52.586 v2(24.519,53.086) ; IC8B.D12@25.019,-1.314 v2(25.519,-1.814) ; IC8B.K12@25.019,4.686 v2(25.519,4.186) ; IC8B.M12@25.019,6.686 v2(25.519,6.186) ; IC8B.P12@25.019,8.686 v2(25.519,9.186) ; IC8B.T12@25.019,10.686 25.417,11.084 v2(25.421,11.084) ; IC8B.V12@25.019,12.686 v2(25.519,13.186) IC8B.W11@26.019,13.686 ; IC8A.D12@25.019,34.586 v2(25.519,34.086) ; IC8A.K12@25.019,40.586 v2(25.519,40.086) ; IC8A.M12@25.019,42.586 v2(25.519,42.086) ; IC8A.P12@25.019,44.586 v2(25.519,45.086) ; IC8A.T12@25.019,46.586 v2(25.519,47.086) ; IC8A.V12@25.019,48.586 v2(25.519,49.086) IC8A.W11@26.019,49.586 ; v2(26.019,-5.014) IC8B.A11@26.019,-4.314 ; IC8B.F11@26.019,0.686 v2(26.519,0.186) ; IC8B.L11@26.019,5.686 v2(26.519,5.186) ; IC8B.N11@26.019,7.686 v2(26.519,7.186) ; IC8B.R11@26.019,9.686 26.361,10.028 v2(26.381,10.028) ; IC8B.U11@26.019,11.686 26.574,12.24 v2(26.574,12.259) ; IC8B.AF11@26.019,20.686 v2(26.519,21.186) ; v2(26.019,30.886) IC8A.A11@26.019,31.586 ; IC8A.F11@26.019,36.586 v2(26.519,36.086) ; IC8A.L11@26.019,41.586 v2(26.519,41.086) ; IC8A.N11@26.019,43.586 v2(26.519,43.086) ; IC8A.R11@26.019,45.586 v2(26.519,46.086) ; IC8A.U11@26.019,47.586 v2(26.519,48.086) ; IC8A.AF11@26.019,56.586 v2(26.519,57.086) ; IC8B.C10@27.019,-2.314 27.019,-2.328 27.358,-2.667 v2(27.358,-2.68) ; IC8B.M10@27.019,6.686 v2(27.519,6.186) ; IC8B.P10@27.019,8.686 27.479,9.145 27.479,9.236 v2(27.498,9.255) ; IC8B.T10@27.019,10.686 27.505,11.172 27.505,11.271 v2(27.524,11.29) ; IC8B.V10@27.019,12.686 v2(27.519,13.186) ; IC8B.AC10@27.019,17.686 v2(27.519,18.186) ; IC8B.AD10@27.019,18.686 v2(27.519,19.186) ; IC8B.AE10@27.019,19.686 v2(27.519,20.186) ; IC8B.AF10@27.019,20.686 v2(27.519,21.186) ; IC8A.C10@27.019,33.586 27.019,33.572 27.358,33.233 v2(27.358,33.22) ; IC8A.M10@27.019,42.586 v2(27.519,42.086) ; IC8A.P10@27.019,44.586 27.019,44.626 27.45,45.058 27.45,45.153 v2(27.469,45.172) ; IC8A.T10@27.019,46.586 v2(27.519,47.086) ; IC8A.V10@27.019,48.586 v2(27.519,49.086) ; IC8A.AC10@27.019,53.586 v2(27.519,54.086) ; IC8A.AD10@27.019,54.586 v2(27.519,55.086) ; IC8A.AE10@27.019,55.586 v2(27.519,56.086) ; IC8A.AF10@27.019,56.586 v2(27.519,57.086) ; IC8B.Y9@28.019,14.686 v2(28.532,15.199) ; IC8B.AC9@28.019,17.686 v2(28.519,18.186) ; IC8B.AD9@28.019,18.686 v2(28.519,19.186) ; IC8B.AF9@28.019,20.686 v2(28.519,21.186) ; IC8A.Y9@28.019,50.586 v2(28.519,51.086) ; IC8A.AC9@28.019,53.586 v2(28.519,54.086) ; IC8A.AD9@28.019,54.586 v2(28.519,55.086) ; IC8A.AF9@28.019,56.586 v2(28.519,57.086) ; IC8B.A8@29.019,-4.314 29.057,-4.314 29.406,-4.663 v2(29.433,-4.663) ; IC8B.B8@29.019,-3.314 v2(29.519,-3.814) ; IC8B.C8@29.019,-2.314 v2(29.519,-2.814) ; IC8B.D8@29.019,-1.314 v2(29.519,-1.814) ; IC8B.E8@29.019,-0.314 v2(29.519,-0.814) ; IC8B.F8@29.019,0.686 v2(29.519,0.186) ; IC8B.G8@29.019,1.686 v2(29.519,1.186) ; IC8B.H8@29.019,2.686 v2(29.519,2.186) ; IC8B.J8@29.019,3.686 v2(29.519,3.186) ; IC8B.K8@29.019,4.686 v2(29.519,4.186) ; IC8B.L8@29.019,5.686 v2(29.519,5.186) ; IC8B.M8@29.019,6.686 v2(29.519,6.186) ; IC8B.N8@29.019,7.686 v2(29.519,7.186) ; IC8B.P8@29.019,8.686 v2(29.519,9.186) ; IC8B.R8@29.019,9.686 v2(29.519,10.186) ; IC8B.T8@29.019,10.686 v2(29.519,11.186) ; IC8B.U8@29.019,11.686 v2(29.519,12.186) ; IC8B.V8@29.019,12.686 v2(29.519,13.186) ; IC8B.W8@29.019,13.686 v2(29.519,14.186) ; IC8B.Y8@29.019,14.686 v2(29.519,15.186) ; IC8B.AA8@29.019,15.686 v2(29.519,16.186) ; IC8B.AB8@29.019,16.686 v2(29.519,17.186) ; IC8B.AC8@29.019,17.686 v2(29.519,18.186) ; IC8B.AD8@29.019,18.686 v2(29.519,19.186) ; IC8B.AF8@29.019,20.686 v2(29.519,21.186) ; IC8A.A8@29.019,31.586 29.057,31.586 29.406,31.237 v2(29.433,31.237) ; IC8A.B8@29.019,32.586 v2(29.519,32.086) ; IC8A.C8@29.019,33.586 v2(29.519,33.086) ; IC8A.D8@29.019,34.586 v2(29.519,34.086) ; IC8A.E8@29.019,35.586 v2(29.519,35.086) ; IC8A.F8@29.019,36.586 v2(29.519,36.086) ; IC8A.G8@29.019,37.586 v2(29.519,37.086) ; IC8A.H8@29.019,38.586 v2(29.519,38.086) ; IC8A.J8@29.019,39.586 v2(29.519,39.086) ; IC8A.K8@29.019,40.586 v2(29.519,40.086) ; IC8A.L8@29.019,41.586 v2(29.519,41.086) ; IC8A.M8@29.019,42.586 v2(29.519,42.086) ; IC8A.N8@29.019,43.586 v2(29.519,43.086) ; IC8A.P8@29.019,44.586 v2(29.519,45.086) ; IC8A.R8@29.019,45.586 v2(29.519,46.086) ; IC8A.T8@29.019,46.586 v2(29.519,47.086) ; IC8A.U8@29.019,47.586 v2(29.519,48.086) ; IC8A.V8@29.019,48.586 v2(29.519,49.086) ; IC8A.W8@29.019,49.586 v2(29.519,50.086) ; IC8A.Y8@29.019,50.586 v2(29.519,51.086) ; IC8A.AA8@29.019,51.586 v2(29.519,52.086) ; IC8A.AB8@29.019,52.586 v2(29.519,53.086) ; IC8A.AC8@29.019,53.586 v2(29.519,54.086) ; IC8A.AD8@29.019,54.586 v2(29.519,55.086) ; IC8A.AF8@29.019,56.586 v2(29.519,57.086) ; v2(30.491,-3.826) 30.511,-3.826 30.999,-4.314 IC8B.A6@31.019,-4.314 ; v2(30.491,32.074) 30.511,32.074 30.999,31.586 IC8A.A6@31.019,31.586 ; v2(30.5,15.2) 30.519,15.219 30.552,15.219 IC8B.AA6@31.019,15.686 ; IC8A.C6@31.019,33.586 v2(31.519,33.086) ; IC8A.E6@31.019,35.586 v2(31.519,35.086) ; IC8A.G6@31.019,37.586 v2(31.519,37.086) ; IC8A.J6@31.019,39.586 v2(31.519,39.086) ; IC8A.L6@31.019,41.586 v2(31.519,41.086) ; IC8A.N6@31.019,43.586 v2(31.519,43.086) ; IC8A.R6@31.019,45.586 v2(31.519,46.086) ; IC8A.U6@31.019,47.586 31.5,47.105 v2(31.5,47.1) ; IC8A.W6@31.019,49.586 v2(31.519,50.086) ; IC8A.AA6@31.019,51.586 31.5,51.105 v2(31.5,51.1) ; IC8A.AC6@31.019,53.586 31.477,54.044 31.523,54.044 v2(31.542,54.063) ; IC8A.AE6@31.019,55.586 v2(31.519,56.086) ; IC8B.C6@31.019,-2.314 v2(31.519,-2.814) ; IC8B.E6@31.019,-0.314 v2(31.519,-0.814) ; IC8B.G6@31.019,1.686 v2(31.519,1.186) ; IC8B.J6@31.019,3.686 v2(31.519,3.186) ; IC8B.L6@31.019,5.686 v2(31.519,5.186) ; IC8B.N6@31.019,7.686 v2(31.519,7.186) ; IC8B.R6@31.019,9.686 v2(31.519,10.186) ; IC8B.U6@31.019,11.686 31.5,11.205 v2(31.5,11.2) ; IC8B.W6@31.019,13.686 v2(31.519,14.186) ; IC8B.AC6@31.019,17.686 v2(31.519,18.186) ; IC8B.AE6@31.019,19.686 v2(31.519,20.186) ; v2(31.494,-3.834) 31.516,-3.834 31.997,-4.314 IC8B.A5@32.019,-4.314 ; v2(31.494,32.066) 31.516,32.066 31.997,31.586 IC8A.A5@32.019,31.586 ; IC8B.B5@32.019,-3.314 v2(32.519,-3.814) ; IC8B.C5@32.019,-2.314 v2(32.519,-2.814) ; IC8B.D5@32.019,-1.314 v2(32.519,-1.814) ; IC8B.AD5@32.019,18.686 v2(32.519,19.186) ; IC8B.AE5@32.019,19.686 v2(32.519,20.186) ; IC8B.AF5@32.019,20.686 v2(32.519,21.186) ; IC8A.B5@32.019,32.586 v2(32.519,32.086) ; IC8A.C5@32.019,33.586 v2(32.519,33.086) ; IC8A.D5@32.019,34.586 v2(32.519,34.086) ; IC8A.AD5@32.019,54.586 v2(32.519,55.086) ; IC8A.AE5@32.019,55.586 v2(32.519,56.086) ; IC8A.AF5@32.019,56.586 v2(32.519,57.086) ; v2(32.6,18.2) 32.619,18.219 32.619,18.286 IC8B.AD4@33.019,18.686 ; v2(32.7,54.3) 32.718,54.3 33.004,54.586 IC8A.AD4@33.019,54.586 ; IC8B.B4@33.019,-3.314 v2(33.519,-3.814) ; IC8B.D4@33.019,-1.314 v2(33.519,-1.814) ; IC8B.F4@33.019,0.686 v2(33.519,0.186) ; IC8B.H4@33.019,2.686 v2(33.519,2.186) ; IC8B.K4@33.019,4.686 v2(33.519,4.186) ; IC8B.M4@33.019,6.686 v2(33.519,6.186) ; IC8B.P4@33.019,8.686 v2(33.519,9.186) ; IC8B.V4@33.019,12.686 v2(33.519,13.186) ; IC8B.Y4@33.019,14.686 v2(33.519,15.186) ; IC8B.AB4@33.019,16.686 v2(33.519,17.186) ; IC8B.AF4@33.019,20.686 v2(33.519,21.186) ; IC8A.B4@33.019,32.586 v2(33.519,32.086) ; IC8A.D4@33.019,34.586 v2(33.519,34.086) ; IC8A.F4@33.019,36.586 v2(33.519,36.086) ; IC8A.H4@33.019,38.586 v2(33.519,38.086) ; IC8A.K4@33.019,40.586 v2(33.519,40.086) ; IC8A.M4@33.019,42.586 v2(33.519,42.086) ; IC8A.P4@33.019,44.586 v2(33.519,45.086) ; IC8A.V4@33.019,48.586 v2(33.519,49.086) ; IC8A.Y4@33.019,50.586 v2(33.519,51.086) ; IC8A.AB4@33.019,52.586 v2(33.519,53.086) ; IC8A.AF4@33.019,56.586 v2(33.519,57.086) ; IC8B.T4@33.062,10.7 v2(33.562,11.2) ; IC8A.T4@33.062,46.6 v2(33.562,47.1) ; v2(33.426,54.106) 33.445,54.125 33.543,54.125 34.004,54.586 IC8A.AD3@34.019,54.586 ; v2(33.6,18.2) 33.619,18.219 33.619,18.286 IC8B.AD3@34.019,18.686 ; IC8B.B3@34.019,-3.314 v2(34.519,-3.814) ; IC8B.D3@34.019,-1.314 v2(34.519,-1.814) ; IC8B.E3@34.019,-0.314 v2(34.519,-0.814) ; IC8B.F3@34.019,0.686 v2(34.519,0.186) ; IC8B.G3@34.019,1.686 v2(34.519,1.186) ; IC8B.H3@34.019,2.686 v2(34.519,2.186) ; IC8B.J3@34.019,3.686 v2(34.519,3.186) ; IC8B.K3@34.019,4.686 v2(34.519,4.186) ; IC8B.L3@34.019,5.686 v2(34.519,5.186) ; IC8B.M3@34.019,6.686 v2(34.519,6.186) ; IC8B.N3@34.019,7.686 v2(34.519,7.186) ; IC8B.P3@34.019,8.686 v2(34.519,9.186) ; IC8B.R3@34.019,9.686 v2(34.519,10.186) ; IC8B.T3@34.019,10.686 v2(34.519,11.186) ; IC8B.U3@34.019,11.686 34.514,12.181 v2(34.519,12.181) ; IC8B.V3@34.019,12.686 v2(34.519,13.186) ; IC8B.W3@34.019,13.686 v2(34.519,14.186) ; IC8B.Y3@34.019,14.686 v2(34.519,15.186) ; IC8B.AA3@34.019,15.686 v2(34.519,16.186) ; IC8B.AB3@34.019,16.686 v2(34.519,17.186) ; IC8B.AC3@34.019,17.686 v2(34.519,18.186) ; IC8B.AF3@34.019,20.686 v2(34.519,21.186) ; IC8A.B3@34.019,32.586 v2(34.519,32.086) ; IC8A.D3@34.019,34.586 v2(34.519,34.086) ; IC8A.E3@34.019,35.586 v2(34.519,35.086) ; IC8A.F3@34.019,36.586 v2(34.519,36.086) ; IC8A.G3@34.019,37.586 v2(34.519,37.086) ; IC8A.H3@34.019,38.586 v2(34.519,38.086) ; IC8A.J3@34.019,39.586 v2(34.519,39.086) ; IC8A.K3@34.019,40.586 v2(34.519,40.086) ; IC8A.L3@34.019,41.586 v2(34.519,41.086) ; IC8A.M3@34.019,42.586 v2(34.519,42.086) ; IC8A.N3@34.019,43.586 v2(34.519,43.086) ; IC8A.P3@34.019,44.586 v2(34.519,45.086) ; IC8A.R3@34.019,45.586 v2(34.519,46.086) ; IC8A.T3@34.019,46.586 v2(34.519,47.086) ; IC8A.U3@34.019,47.586 v2(34.519,48.086) ; IC8A.V3@34.019,48.586 v2(34.519,49.086) ; IC8A.W3@34.019,49.586 v2(34.519,50.086) ; IC8A.Y3@34.019,50.586 v2(34.519,51.086) ; IC8A.AA3@34.019,51.586 v2(34.519,52.086) ; IC8A.AB3@34.019,52.586 v2(34.519,53.086) ; IC8A.AC3@34.019,53.586 v2(34.519,54.086) ; IC8A.AF3@34.019,56.586 v2(34.519,57.086) ; IC8B.A2@35.019,-4.314 35.034,-4.314 35.499,-3.849 v2(35.514,-3.849) ; IC8B.C2@35.019,-2.314 v2(35.519,-2.814) ; IC8B.E2@35.019,-0.314 v2(35.519,-0.814) ; IC8B.G2@35.019,1.686 v2(35.519,1.186) ; IC8B.J2@35.019,3.686 v2(35.519,3.186) ; IC8B.L2@35.019,5.686 v2(35.519,5.186) ; IC8B.N2@35.019,7.686 v2(35.519,7.186) ; IC8B.R2@35.019,9.686 35.386,9.319 35.481,9.319 v2(35.5,9.3) ; IC8B.U2@35.019,11.686 35.486,11.686 v2(35.5,11.7) ; IC8B.W2@35.019,13.686 35.034,13.671 35.402,13.671 35.473,13.6 v2(35.5,13.6) ; IC8B.AA2@35.019,15.686 35.486,15.686 v2(35.5,15.7) ; IC8B.AC2@35.019,17.686 35.027,17.694 35.436,17.694 v2(35.444,17.702) ; IC8B.AE2@35.019,19.686 35.033,19.7 v2(35.5,19.7) ; IC8A.A2@35.019,31.586 35.034,31.586 35.499,32.051 v2(35.514,32.051) ; IC8A.C2@35.019,33.586 v2(35.519,33.086) ; IC8A.E2@35.019,35.586 v2(35.519,35.086) ; IC8A.G2@35.019,37.586 v2(35.519,37.086) ; IC8A.J2@35.019,39.586 v2(35.519,39.086) ; IC8A.L2@35.019,41.586 v2(35.519,41.086) ; IC8A.N2@35.019,43.586 v2(35.519,43.086) ; IC8A.R2@35.019,45.586 35.486,45.586 v2(35.5,45.6) ; IC8A.U2@35.019,47.586 35.486,47.586 v2(35.5,47.6) ; IC8A.W2@35.019,49.586 35.486,49.586 v2(35.5,49.6) ; IC8A.AA2@35.019,51.586 35.027,51.594 35.436,51.594 v2(35.444,51.602) ; IC8A.AC2@35.019,53.586 35.486,53.586 v2(35.5,53.6) ; IC8A.AE2@35.019,55.586 35.486,55.586 v2(35.5,55.6) ; IC8B.A1@36.019,-4.314 v2(36.453,-3.881) ; IC8B.C1@36.019,-2.314 v2(36.519,-2.814) ; IC8B.E1@36.019,-0.314 v2(36.519,-0.814) ; IC8B.G1@36.019,1.686 v2(36.519,1.186) ; IC8B.J1@36.019,3.686 v2(36.519,3.186) ; IC8B.L1@36.019,5.686 v2(36.519,5.186) ; IC8B.N1@36.019,7.686 v2(36.519,7.186) ; IC8B.R1@36.019,9.686 36.4,9.305 v2(36.4,9.3) ; IC8B.U1@36.019,11.686 36.486,11.686 v2(36.5,11.7) ; IC8B.W1@36.019,13.686 36.486,13.686 v2(36.5,13.7) ; IC8B.AA1@36.019,15.686 36.486,15.686 v2(36.5,15.7) ; IC8B.AC1@36.019,17.686 36.486,17.686 v2(36.5,17.7) ; IC8B.AE1@36.019,19.686 36.486,19.686 v2(36.5,19.7) ; IC8A.A1@36.019,31.586 v2(36.453,32.019) ; IC8A.C1@36.019,33.586 v2(36.519,33.086) ; IC8A.E1@36.019,35.586 v2(36.519,35.086) ; IC8A.G1@36.019,37.586 v2(36.519,37.086) ; IC8A.J1@36.019,39.586 v2(36.519,39.086) ; IC8A.L1@36.019,41.586 v2(36.519,41.086) ; IC8A.N1@36.019,43.586 v2(36.519,43.086) ; IC8A.R1@36.019,45.586 36.486,45.586 v2(36.5,45.6) ; IC8A.U1@36.019,47.586 36.486,47.586 v2(36.5,47.6) ; IC8A.W1@36.019,49.586 36.486,49.586 v2(36.5,49.6) ; IC8A.AA1@36.019,51.586 36.484,51.586 v2(36.5,51.602) ; IC8A.AC1@36.019,53.586 36.027,53.594 36.436,53.594 v2(36.444,53.602) ; IC8A.AE1@36.019,55.586 36.026,55.593 36.437,55.593 v2(36.444,55.6) ; v1@60.944,21.955 C99B.1@61.672,21.955 ; v1(60.974,57.862) 60.977,57.859 61.546,57.859 C99A.1@61.579,57.826 ; J1B.1@73.654,7.478 73.659,7.472 J1B.1@73.669,7.472 v1(75.463,7.472) ; J1B.3@73.654,9.478 73.659,9.472 J1B.3@73.669,9.472 v1(75.463,9.472) ; J1B.5@73.654,11.478 73.659,11.472 J1B.5@73.669,11.472 v1(75.463,11.472) ; J1B.7@73.654,13.478 73.659,13.472 J1B.7@73.669,13.472 v1(75.463,13.472) ; J1B.9@73.654,15.478 73.659,15.472 J1B.9@73.669,15.472 v1(75.463,15.472) ; J1B.11@73.654,17.478 73.659,17.472 J1B.11@73.669,17.472 v1(75.463,17.472) ; J1B.13@73.669,19.472 73.675,19.467 v1(75.479,19.467) ; J1A.1@73.729,43.341 73.734,43.336 J1A.1@73.744,43.336 v1(75.538,43.336) ; J1A.3@73.729,45.341 73.734,45.336 J1A.3@73.744,45.336 v1(75.538,45.336) ; J1A.5@73.729,47.341 73.734,47.336 J1A.5@73.744,47.336 v1(75.538,47.336) ; J1A.7@73.729,49.341 73.734,49.336 J1A.7@73.744,49.336 v1(75.538,49.336) ; J1A.9@73.729,51.341 73.734,51.336 J1A.9@73.744,51.336 v1(75.538,51.336) ; J1A.11@73.729,53.341 73.734,53.336 J1A.11@73.744,53.336 v1(75.538,53.336) ; J1A.13@73.744,55.336 73.75,55.33 v1(75.554,55.33) ; v1(76.558,58.828) 76.562,58.832 77.465,58.832 PB1A.3@77.469,58.836 ; PB1B.3@77.469,18.304 77.472,18.301 78.365,18.301 v1(78.368,18.298) ; v1(78.819,59.686) 78.819,60.286 79.069,60.536 PB1A.1@79.119,60.536 ; PB1B.1@79.119,20.004 79.569,20.004 80.127,20.561 80.231,20.561 v1(80.269,20.6) ; v1(79.999,-18.134) DD3.36@79.999,-17.671 ; C25.1@80.917,-23.077 80.957,-23.077 81.022,-23.142 81.022,-23.182 81.773,-23.934 81.773,-24.483 v1(81.812,-24.521) ; v1(81.479,-9.374) 81.489,-9.364 C109.1@82.219,-9.364 ; C41.1@83.519,-9.364 83.569,-9.314 83.594,-9.339 84.194,-9.339 v1(84.219,-9.314) ; v1(86.431,-9.462) 86.438,-9.468 86.438,-10.082 C42.1@86.444,-10.088 ; C108.1@88.17,-11.454 88.189,-11.435 88.199,-11.444 88.786,-11.444 v1(88.796,-11.435) ; C26.1@89.328,-15.366 89.347,-15.347 89.347,-14.449 C105.1@89.365,-14.43 v1(89.365,-13.66) ; D5.2@112.719,2.986 v1@113.545,2.986
  Top Layer w0.4: DA7.29@8.904,-31.224 8.904,-31.679 10.074,-32.849 DA7.5@11.804,-32.849 ; DA7.9@11.804,-30.249 11.819,-30.234 13.278,-30.234 13.32,-30.192 v1(13.347,-30.192) ; C220.1@61.991,-12.794 v1(61.991,-11.733) ; v1(63.703,-7.697) C212.1@64.763,-7.697 ; v1(66.048,-22.581) C218.1@66.048,-21.544 C223.1@66.048,-19.581 ; C224.1@67.291,-7.68 v1(68.352,-7.68) ; v1(69.505,-22.588) C219.1@69.505,-21.544 C213.1@69.505,-19.588 ; C217.1@72.553,-12.371 v1(73.635,-12.371) ; v1(75.886,-18.914) C33.1@76.719,-18.914 ; v1(77.958,-11.367) 77.969,-11.356 78.755,-11.356 C40.1@78.769,-11.342 ; C24.1@90.36,-19.01 v1(91.262,-19.01) ; v1(98.41,-25.365) C199.1@98.41,-24.282 ; DD31.3@98.769,-7.464 v1(99.852,-7.464) ; v1(100.845,-15.63) 100.845,-16.872 ZQ2.2@100.868,-16.895 ; ZQ2.2@101.118,-16.895 v1(102.2,-16.895) ; v1(103.047,-10.481) C259.1@104.13,-10.481 ; C259.1@104.119,-10.414 104.169,-10.464 106.369,-10.464 DD5.24@106.419,-10.514 ; v1(108.519,-21.997) C257.1@108.519,-20.914 108.844,-20.589 108.844,-20.039 108.919,-19.964 DD5.34@108.919,-18.614 ; DD5.14@109.719,-3.214 109.793,-3.14 109.793,-2.215 110.919,-1.089 C258.1@110.919,-0.914 v1(110.919,0.168) ; v1(116.219,-21.997) C256.1@116.219,-20.914 116.219,-20.739 116.919,-20.039 DD5.44@116.919,-18.614 ; DD5.52@121.819,-14.514 v1(122.902,-14.514) ; DD5.60@121.819,-8.114 v1(122.902,-8.114) ; v1(124.419,-13.097) C86.1@124.419,-12.014 ; C88.1@124.527,-7.034 v1(124.527,-5.952)
  Top Layer w0.5: R28.1@77.341,-14.609 77.341,-15.393 v1(77.319,-15.414) 77.409,-15.504 78.259,-15.504 C106.1@78.319,-15.564
  Top Layer w1: C124.1@-4.246,-31.044 -4.178,-30.975 v3(-4.178,-29.713) ; v3(18.444,-31.089) C142.1@19.744,-31.089 ; v3(102.739,-42.986) v3(102.739,-38.886) ; v3(102.818,-33.958) v3(102.818,-29.858)
  Bottom Layer w0.2: v1(-61.981,-9.414) -61.031,-9.414 T1.2@-60.981,-9.364 ; v1(-57.869,-9.353) T2.2@-56.943,-9.353 ; T2.2@-56.943,-9.364 -56.743,-9.364 -56.336,-8.957 R97.1@-54.923,-8.957 ; C132.1@0.948,-28.554 1.123,-28.554 1.548,-28.129 1.548,-28.094 1.801,-27.841 1.801,-27.652 v1(1.854,-27.599) C122.1@3.154,-27.599
  Bottom Layer w0.254: v1(57.607,0.799) 57.616,0.808 58.265,0.808 R152B.1@58.274,0.817 ; v1(57.607,2.069) 57.616,2.078 58.265,2.078 R153B.1@58.274,2.087 ; v1(57.607,3.339) 57.616,3.348 58.265,3.348 R154B.1@58.274,3.357 ; v1(57.607,4.609) 57.616,4.618 58.265,4.618 R155B.1@58.274,4.627 ; v1(57.682,36.663) 57.691,36.672 58.34,36.672 R152A.1@58.349,36.681 ; v1(57.682,37.933) 57.691,37.942 58.34,37.942 R153A.1@58.349,37.951 ; v1(57.682,39.203) 57.691,39.212 58.34,39.212 R154A.1@58.349,39.221 ; v1(57.682,40.473) 57.691,40.482 58.34,40.482 R155A.1@58.349,40.491